# Altium PCB PCB1.PcbDoc
Units mm, origin at the board's own origin, x right, y up, seen from the top; angles counter-clockwise.
Board outline 100 x 68.1 mm, 2 copper layers (Top Layer, Bottom Layer), stack 1.571 mm thick; 56 components, 32 nets, 186 pads, 495 vias.
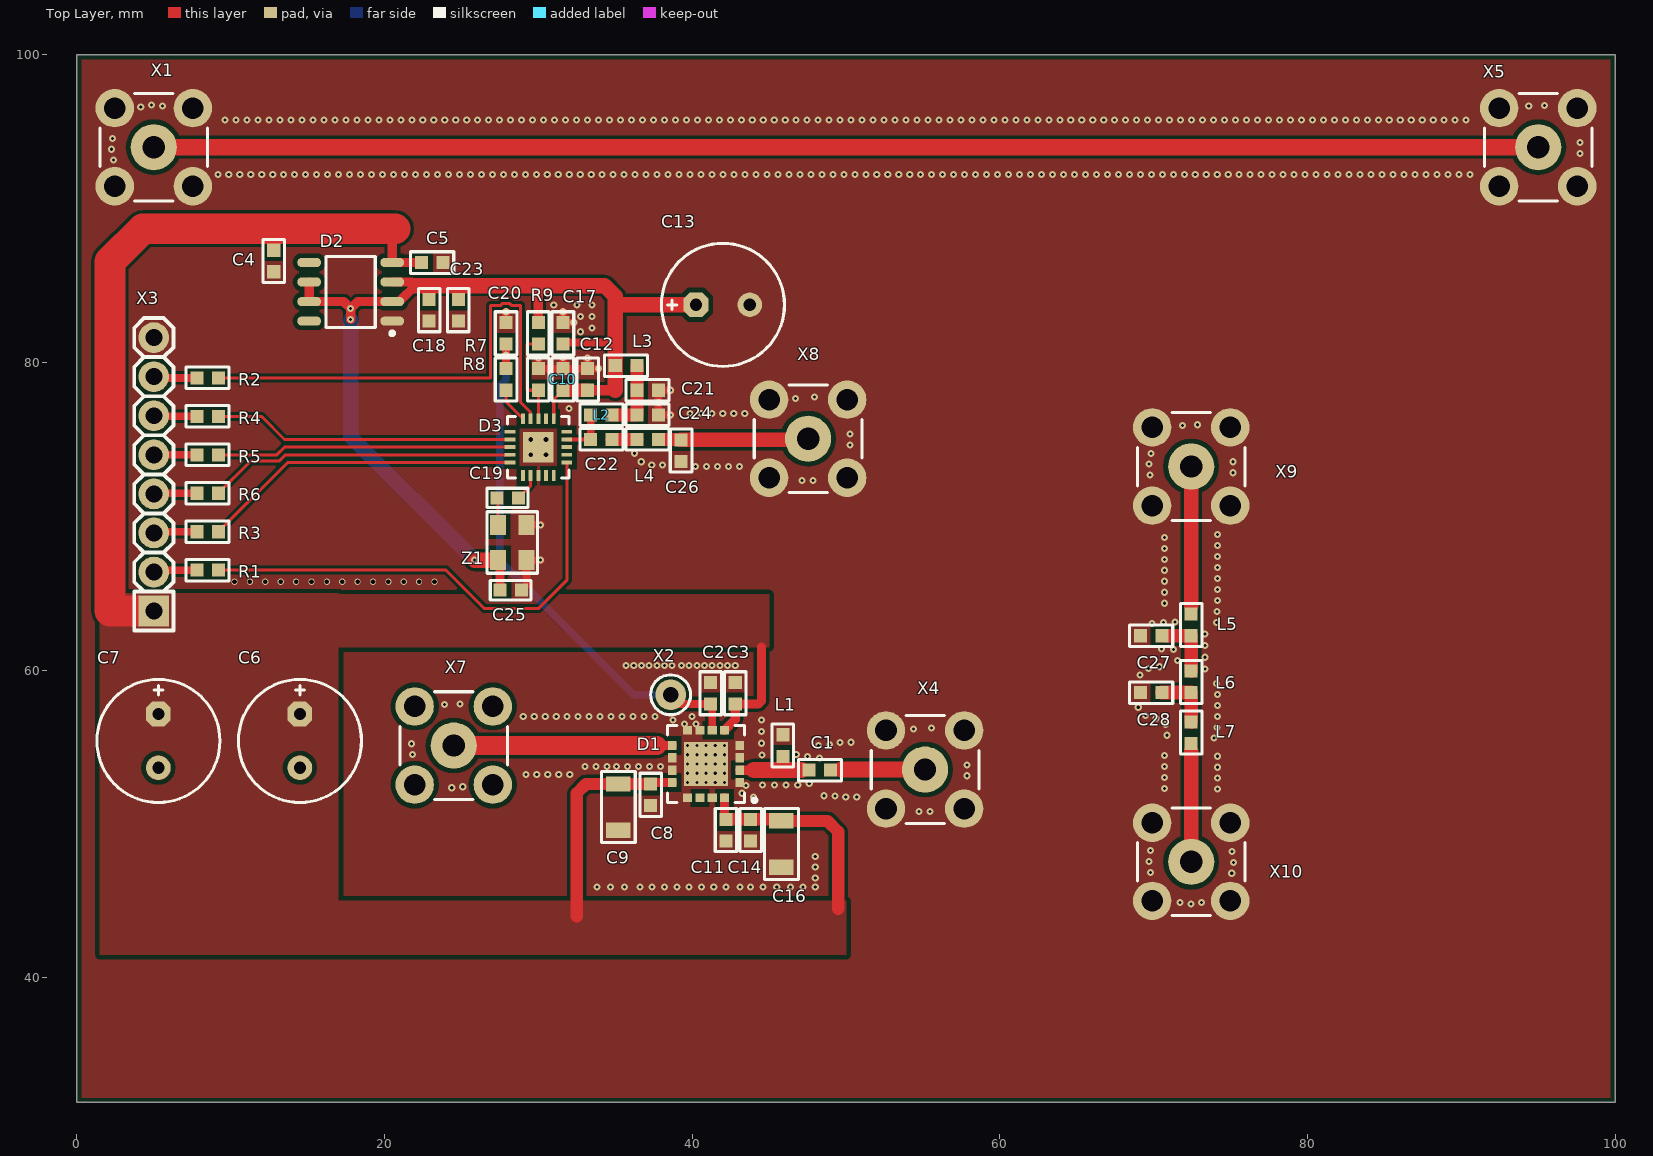
[diagram p0: Top Layer view]
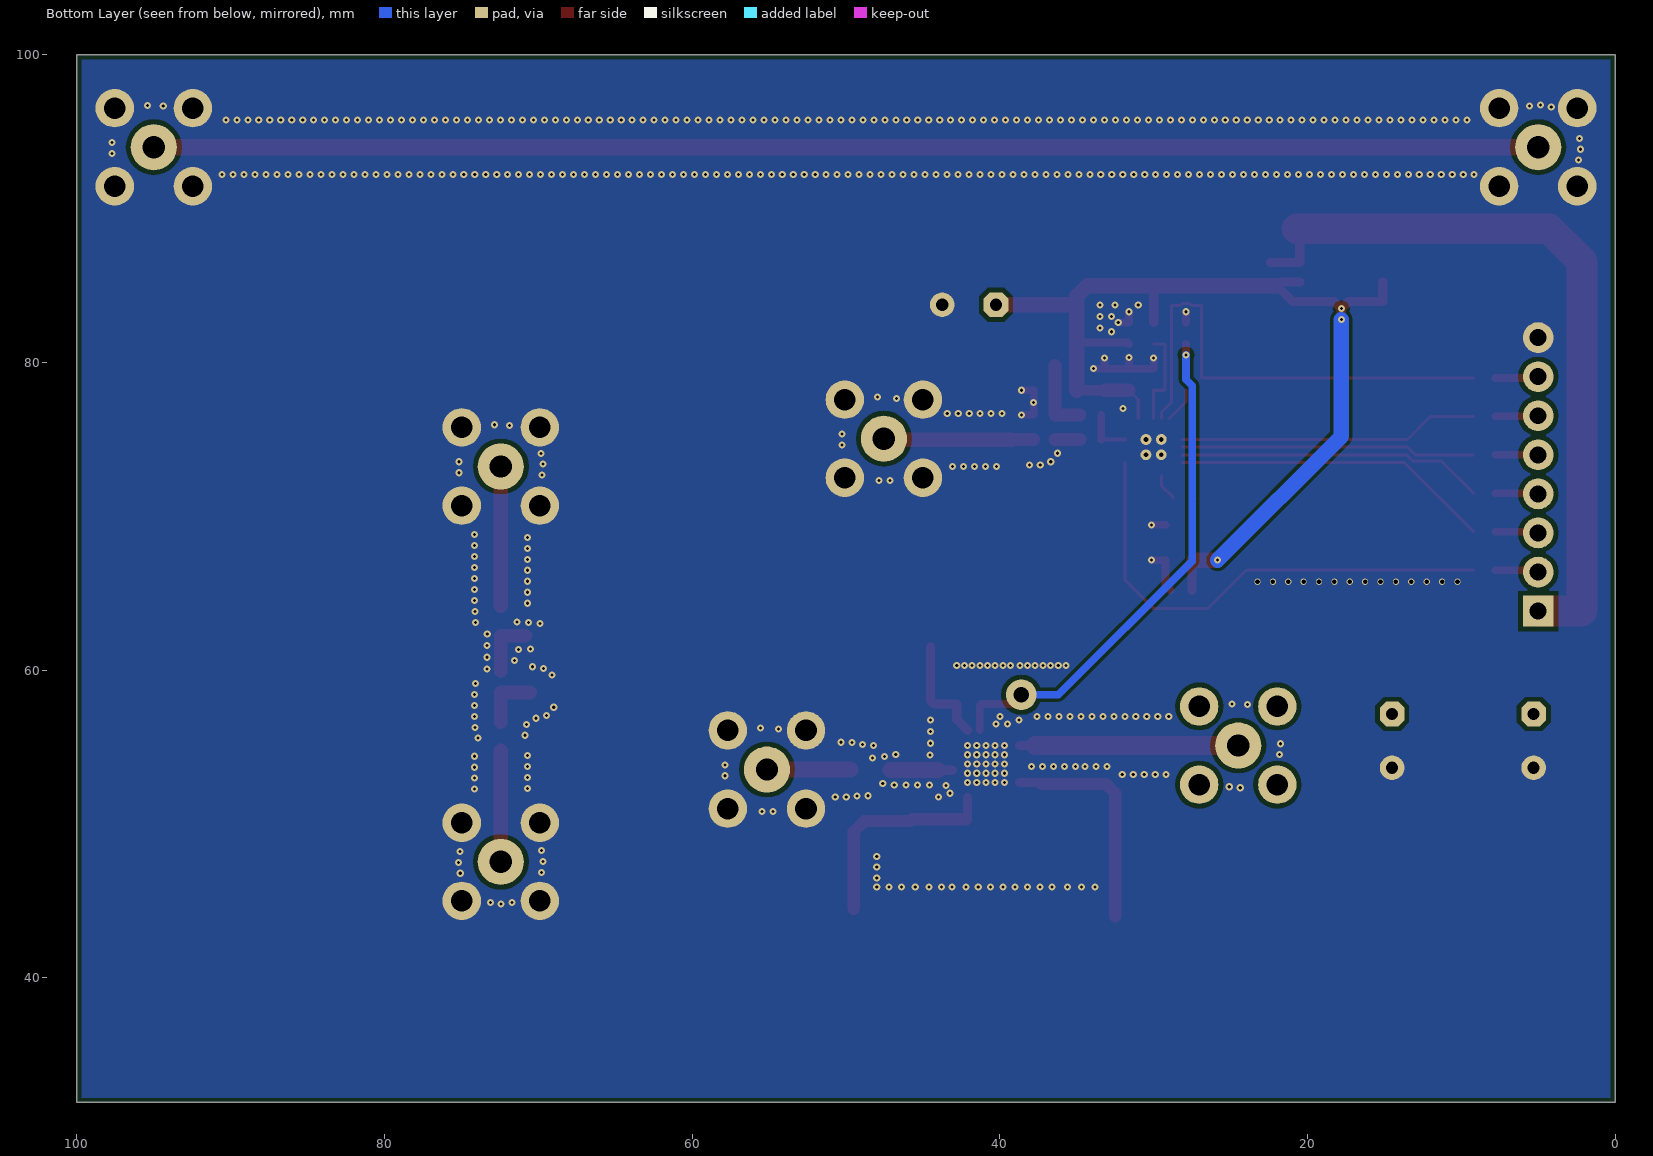
[diagram p1: Bottom Layer view, seen from below]
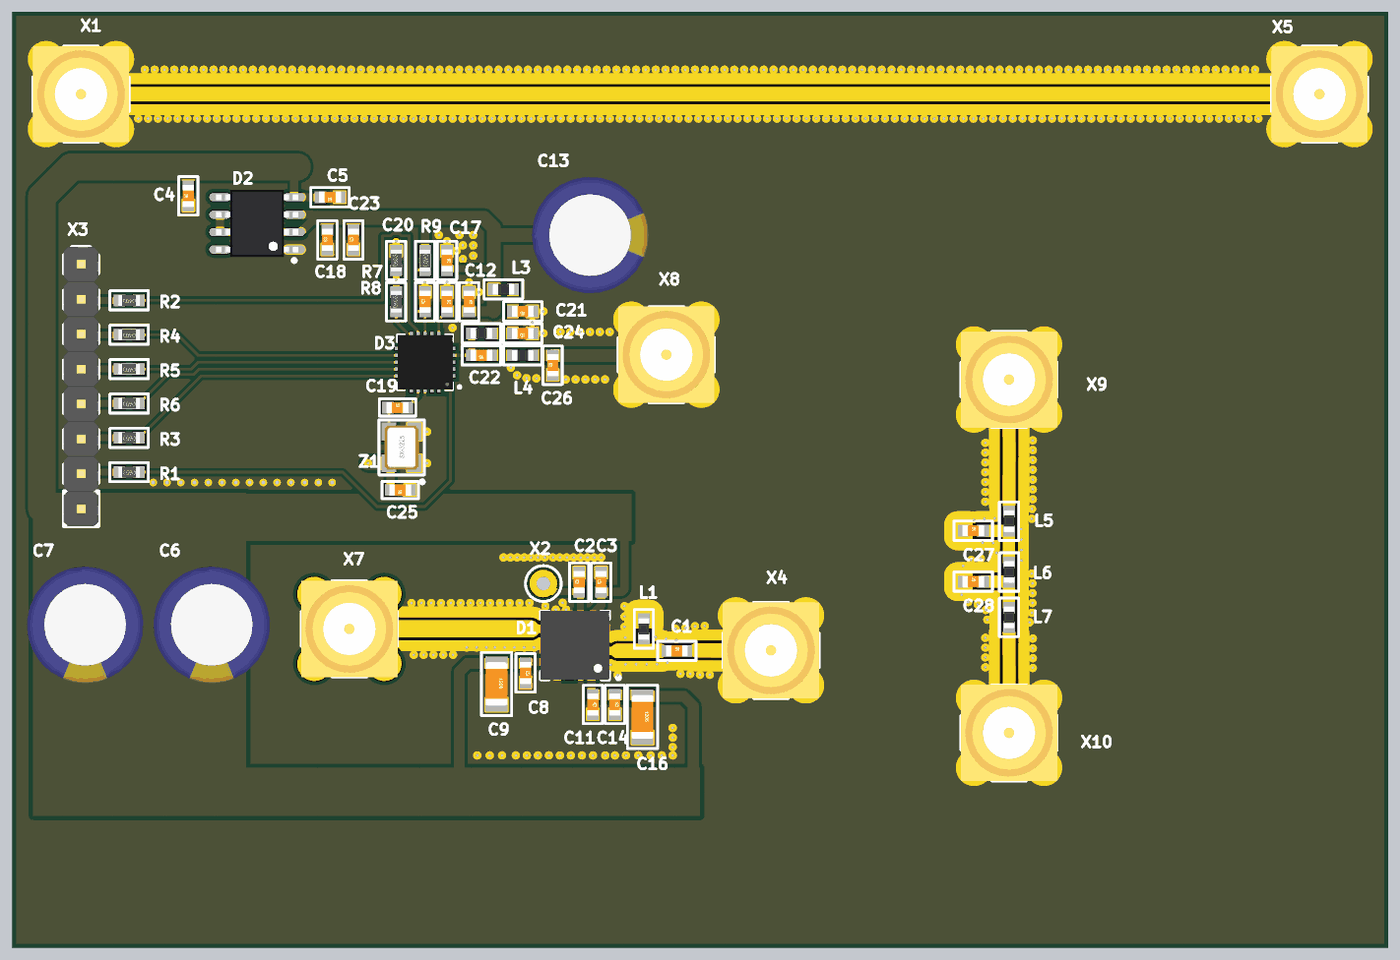
[diagram p2: 3D render of the assembled board from above, using the file's embedded part models]

## Layer stack, top to bottom
Top Solder: solder mask 0.013, Solder Resist, Dk 3.8
Top Layer: signal copper 0.0356
Dielectric 1: dielectric 1.5, FR-4, Dk 4.8
Bottom Layer: signal copper 0.0356
Bottom Solder: solder mask 0.013, Solder Resist, Dk 3.8

## Board outline
0,31.9 0,100 100,100 100,31.9

## Design rules (kind name [scope] priority, off if disabled: settings)
BoardOutlineClearance [All] p1: gap=0.3 ignorepadtopadclearanceinfootprint=FALSE
Clearance Clearance_MultiLayerPad [OnLayer('Multi-Layer') and IsPad] p1: gap=0.3 ignorepadtopadclearanceinfootprint=FALSE except(0: Arc-Hole Track-Hole SMDPad-Hole THPad-Hole Via-Hole Fill-Hole Poly-Hole Region-Hole Text-Hole)
Clearance Clearance_Polygon [InPolygon] p2: gap=0.2 ignorepadtopadclearanceinfootprint=FALSE except(0: Arc-Hole Track-Hole SMDPad-Hole THPad-Hole Via-Hole Fill-Hole Poly-Hole Region-Hole Text-Hole; 0.3: Arc-Poly Arc-Region Track-Region SMDPad-Poly SMDPad-Region THPad-Poly THPad-Region Via-Poly Via-Region Fill-Poly Fill-Region Poly-Poly Poly-Region Region-Region)
Clearance [All] p3: gap=0.2 ignorepadtopadclearanceinfootprint=FALSE except(0: Arc-Hole Track-Hole SMDPad-Hole THPad-Hole Via-Hole Fill-Hole Poly-Hole Region-Hole Text-Hole)
ComponentClearance [All] p1: gap=0.5 collisioncheckmode=3 verticalgap=0.5 showdistances=FALSE
DiffPairsRouting [All] p1: maxlimit=0.4 minlimit=0.2 mostfreqgap=0.2 toplayer_minwidth=0.2 toplayer_maxwidth=0.3 toplayer_prefwidth=0.2 bottomlayer_minwidth=0.2 bottomlayer_maxwidth=0.3 bottomlayer_prefwidth=0.2 maxuncoupledlength=12.7
Height [All] p1: minheight=0 maxheight=50 prefheight=12.7
HoleSize [All] p1: absolutevalues=TRUE maxlimit=6.3 minlimit=0.2 maxpercent=80.000 minpercent=20.000
HoleToHoleClearance [All] p1: gap=0.3 allowstackedmicrovias=TRUE
MinimumAnnularRing [All] p1: minimumring=0.13
MinimumSolderMaskSliver [All] p1: minsoldermaskwidth=0.2
PlaneClearance [All] p1: clearance=0.5
PlaneConnect [All] p1: planeconnectstyle=Relief reliefexpansion=0.5 reliefentries=4 reliefconductorwidth=0.5 reliefairgap=0.3
PolygonConnect PolygonConnect_1 [InNet('VCC')] p1: connectstyle=Relief reliefconductorwidth=0.254 reliefentries=4 polygonreliefangle="90 Angle" airgapwidth=0.254
PolygonConnect PolygonConnect_PadGND [InNet('GND') and IsPad] p2: connectstyle=Direct reliefconductorwidth=0.5 reliefentries=4 polygonreliefangle="90 Angle" airgapwidth=0.3
PolygonConnect PolygonConnect_Via [IsVia] p3: connectstyle=Direct reliefconductorwidth=0.254 reliefentries=4 polygonreliefangle="90 Angle" airgapwidth=0.254
PolygonConnect [All] p4: connectstyle=Direct reliefconductorwidth=0.5 reliefentries=4 polygonreliefangle="90 Angle" airgapwidth=0.3
RoutingTopology [All] p1: topology=Vertical
RoutingVias [All] p1: holewidth=0.2 width=0.4 viastyle="Through Hole" minholewidth=0.2 minwidth=0.4 maxholewidth=0.5 maxwidth=1.2
SilkToSolderMaskClearance [IsPad] p1: minsilkscreentomaskgap=0.2 clearancetoexposedcopper=TRUE
SolderMaskExpansion [All] p1: expansion=0.075
Width [All] p1: maxlimit=10 minlimit=0.2 preferedwidth=0.2
20 further rules are at their usual default settings.

## Components (designator, comment, footprint, x,y, rotation, side; value= is the part's Value field where it differs from the comment)
C1 "0 пФ" CH0603C#1 48.3,53.5 r0 top
C2 "3300 пФ" CH0603C#2 41.2,58.5 r90 top
C3 "3300 пФ" CH0603C#2 42.8,58.5 r90 top
C4 "0,1 мкФ" CH0603C#2 12.8,86.6 r90 top
C5 "0,1 мкФ" CH0603C#2 23.1,86.5 r180 top
C6 "820 мкФ" D8C3.5H12 14.5,55.4 r270 top
C7 "820 мкФ" D8C3.5H12 5.3,55.4 r270 top
C8 "3300 пФ" CH0603C#2 37.3,51.9 r270 top
C9 "10 мкФ" CH1206C 35.2,51.1 r270 top
C10 "3300 пФ" CH0603C#2 31.6,78.9 r270 top
C11 "100 пФ" CH0603C#2 42.2,49.6 r270 top
C12 "0,1 мкФ" CH0603C#2 33.2,78.9 r270 top
C13 "820 мкФ" D8C3.5H12 42,83.75 r0 top
C14 "3300 пФ" CH0603C#2 43.8,49.6 r270 top
C16 "10 мкФ" CH1206C 45.8,48.7 r270 top
C17 "0,1 мкФ" CH0603C#2 31.6,81.9 r270 top
C18 "0,1 мкФ" CH0603C#2 22.9,83.4 r90 top
C19 "Ceramic capacitor, 0.1 мкФ, X7R, ±10%, 16V, 0603, -55...+125°C" "CAP: 0603" 28,71.2 r0 top value="0.1 мкФ"
C20 "0,1 мкФ" CH0603C#2 30,78.9 r90 top
C21 "0,1 мкФ" CH0603C#2 37.1,78.2 r180 top
C22 "3,3 пФ" CH0603C#2 34.1,75 r180 top
C23 "0,1 мкФ" CH0603C#2 24.8,83.4 r90 top
C24 "3300 пФ" CH0603C#2 37.1,76.6 r180 top
C25 "Ceramic capacitor, 100 пФ, NP0, ±10%, 16V, 0603, -55...+125°C" "CAP: 0603" 28.2,65.2 r180 top value="100 пФ"
C26 "5,1 пФ" CH0603C#2 39.275,74.275 r90 top
C27 "3,3 пФ" CH0603C#1 69.84,62.24 r0 top
C28 "10 пФ" CH0603C#1 69.84,58.54 r0 top
D1 "SKY66295-11" "16-LGA (5x5)" 40.9,53.9 r180 top
D2 "LD1117D33" 8-SOIC 17.8,84.6 r180 top
D3 "SI4464-B1B-FM" "20-QFN (4x4)" 30,74.5 r180 top
L1 "DNI" CH0603L#1 45.9,55.1 r90 top
L2 "120 нГн" CH0603L#2 34.1,76.6 r180 top
L3 "120 нГн" CH0603L#2 35.7,79.8 r0 top
L4 "15 нГн" CH0603L#2 37.1,75 r180 top
L5 "12 нГн" CH0603L#1 72.44,62.94 r90 top
L6 "12 нГн" CH0603L#1 72.44,59.24 r90 top
L7 "0 нГн" CH0603L#1 72.44,55.94 r90 top
R1 "100 Ом" CH0603R 8.5,66.5 r180 top
R2 "100 Ом" CH0603R 8.5,79 r180 top
R3 "100 Ом" CH0603R 8.5,69 r180 top
R4 "100 Ом" CH0603R 8.5,76.5 r180 top
R5 "100 Ом" CH0603R 8.5,74 r180 top
R6 "100 Ом" CH0603R 8.5,71.5 r180 top
R7 "1 кОм" CH0603R 27.9,81.9 r90 top
R8 "1 кОм" CH0603R 27.9,78.9 r90 top
R9 "4,7 Ом" CH0603R 30,81.9 r270 top
X1 "Connector SMA, 50 Ohm, 3GHz" "CON: SMA" 5,94 r0 top
X2 "*" "CON: PADS 1x1mm" 38.6,58.4 r0 top
X3 "*" "CON: PLS-8" 5,72.73 r90 top
X4 "Connector SMA, 50 Ohm, 3GHz" "CON: SMA" 55.14,53.54 r270 top
X5 "Connector SMA, 50 Ohm, 3GHz" "CON: SMA" 95,94 r270 top
X7 "Connector SMA, 50 Ohm, 3GHz" "CON: SMA" 24.5,55.1 r180 top
X8 "Connector SMA, 50 Ohm, 3GHz" "CON: SMA" 47.536,75.049 r0 top
X9 "Connector SMA, 50 Ohm, 3GHz" "CON: SMA" 72.44,73.24 r270 top
X10 "Connector SMA, 50 Ohm, 3GHz" "CON: SMA" 72.44,47.54 r270 top
Z1 "JT33-B-K-3,3-LF-26,0MHz" "OSC: 3225" 28.3,68.3 r90 top

## Footprints (in the part's own frame and the unit in brackets; to place one, negate y for a bottom-side part, rotate by r counter-clockwise, add the part's x,y. Pads: shape width x height; smd on the part's side, far side on the other; paste and mask are expansions set on the pad)
8-SOIC [mm]
  rrect100% 1.55x0.6 smd: 1(-2.7,1.905) 2(-2.7,0.635) 3(-2.7,-0.635) 4(-2.7,-1.905) 5(2.7,-1.905) 6(2.7,-0.635) 7(2.7,0.635) 8(2.7,1.905)
  round 0.7 on Mech1: 28(-2.395,1.8)
  silkscreen extent -2.82,-2.3 1.61,2.82, body extent -3,-2.45 3,2.45, height 1.75
"16-LGA (5x5)" [mm] "PQFN, 16-Leads, Body 5,00x5,00mm, Pitch 0,80mm, Thermal Pad 2,88x2,88mm, IPC Medium Density"
  rect 2.88x2.88 smd: 0(0,0)
  rect 0.55x0.6 smd: 1(-2.2,1.2) 2(-2.2,0.4) 3(-2.2,-0.4) 4(-2.2,-1.2) 9(2.2,-1.2) 10(2.2,-0.4) 11(2.2,0.4) 12(2.2,1.2)
  rect 0.6x0.55 smd: 5(-1.2,-2.2) 6(-0.4,-2.2) 7(0.4,-2.2) 8(1.2,-2.2) 13(1.2,2.2) 14(0.4,2.2) 15(-0.4,2.2) 16(-1.2,2.2)
  silkscreen extent -3.28,-2.5 2.5,2.5, body extent -2.5,-2.5 2.5,2.5, height 1.4
"20-QFN (4x4)" [mm]
  round 0.4 on Top Overlay: 0(-2.5,1.8)
  rect 0.7x0.25 smd: 1(-1.85,1) 2(-1.85,0.5) 3(-1.85,0) 4(-1.85,-0.5) 5(-1.85,-1) 11(1.85,-1) 12(1.85,-0.5) 13(1.85,0) 14(1.85,0.5) 15(1.85,1)
  rect 0.25x0.7 smd: 6(-1,-1.85) 7(-0.5,-1.85) 8(0,-1.85) 9(0.5,-1.85) 10(1,-1.85) 16(1,1.85) 17(0.5,1.85) 18(0,1.85) 19(-0.5,1.85) 20(-1,1.85)
  round 0.7 hole 0.3: 21(-0.5,0.5) 21(0.5,-0.5)
  rect 2x2 smd: 21(0,0)
  round 0.5 on Mech1: 23(-1.5,1.5)
  silkscreen extent -2,-2 2,2, body extent -2.02,-2.01 2,2.01, height 0.78
"CAP: 0603" [mm]
  rect 0.85x0.85 smd: 1(-0.7,0) 2(0.7,0)
  silkscreen extent -1.33,-0.63 1.33,0.63, body extent -0.8,-0.4 0.8,0.4, height 0.3
CH0603C#1 [mm] "Chip Capacitor, 2-Leads, Body 1,53x0,85mm, IPC Medium Density"
  rect 0.85x0.85 smd mask+1: 1(-0.7,0) 2(0.7,0)
  silkscreen extent -1.4,-0.7 1.4,0.7, body extent -0.8,-0.4 0.8,0.4, height 0.3
CH0603C#2 [mm] "Chip Capacitor, 2-Leads, Body 1,53x0,85mm, IPC Medium Density"
  rect 0.85x0.85 smd: 1(-0.7,0) 2(0.7,0)
  silkscreen extent -1.4,-0.7 1.4,0.7, body extent -0.8,-0.4 0.8,0.4, height 0.3
CH0603L#1 [mm]
  rect 0.85x0.85 smd mask+1: 1(-0.7,0) 2(0.7,0)
  silkscreen extent -1.4,-0.7 1.4,0.7, body extent -0.8,-0.4 0.8,0.4, height 0.8
CH0603L#2 [mm]
  rect 0.85x0.85 smd: 1(-0.7,0) 2(0.7,0)
  silkscreen extent -1.4,-0.7 1.4,0.7, body extent -0.8,-0.4 0.8,0.4, height 0.8
CH0603R [mm]
  rect 0.85x0.85 smd: 1(-0.7,0) 2(0.7,0)
  silkscreen extent -1.4,-0.7 1.4,0.7, body extent -0.8,-0.4 0.8,0.4, height 0.44
CH1206C [mm] "Non polar chip capacitor, size 1206"
  rect 1x1.6 smd: 1(-1.5,0) 2(1.5,0)
  silkscreen extent -2.3,-1.1 2.3,1.1, body extent -1.6,-0.8 1.6,0.8, height 1
"CON: PADS 1x1mm" [mm]
  round 2 hole 1: 1(0,0)
  silkscreen extent -1.3,-1.3 1.3,1.3
"CON: PLS-8" [mm] "PLS-40 8 pin header"
  rect 2x2 hole 1.1: 1(-8.89,0)
  round 2 hole 1.1: 2(-6.35,0) 3(-3.81,0) 4(-1.27,0) 5(1.27,0) 6(3.81,0) 7(6.35,0) 8(8.89,0)
  silkscreen extent -10.16,-1.27 10.16,1.27, body extent -10.16,-1.27 10.16,1.27, height 8.54
"CON: SMA" [mm]
  round 3 hole 1.45: 1(0,0)
  round 2.5 hole 1.4: 2(-2.54,-2.54) 2(-2.54,2.54) 2(2.54,-2.54) 2(2.54,2.54)
  silkscreen extent -3.5,-3.5 3.5,3.5, body extent -3.5,-3.5 3.5,3.5, height 9.53
D8C3.5H12 [mm] "Polar capacitor, diameter 8 mm, leads clearance 3.5 mm, height 12 mm"
  oct 1.6x1.6 hole 0.8: 1(-1.75,0)
  round 1.6 hole 0.8: 2(1.75,0)
  silkscreen extent -4,-4 4,4, body extent -4.25,-4.25 4.25,4.25, height 13
"OSC: 3225" [mm]
  rect 1.3x1.05 smd: 1(-1.15,-0.925) 2(1.15,-0.925) 3(1.15,0.925) 4(-1.15,0.925)
  round 0.5 on Top Overlay: ""(-2.5,-1.5)
  silkscreen extent -2,-1.65 2,1.65, body extent -1.6,-1.25 1.6,1.25, height 0.81

## Part data
C1: library part Capacitor, Manufacturer=MURATA, Package=0603, Tolerance=±5%, TypeDielectric=NP0, ValueManufacturerPartNumber="0603-NP0-50В-0 пФ±5% MURATA", Voltage=50В
C2 C3 C8 C10 C14 C24: library part Capacitor, Manufacturer=MURATA, Package=0603, Tolerance=±5%, TypeDielectric=NP0, ValueManufacturerPartNumber="0603-NP0-50В-3300 пФ±5% MURATA", Voltage=50В
C4 C5 C12 C17 C18 C20 C21 C23: library part Capacitor, Manufacturer=MURATA, Package=0603, Tolerance=±5%, TypeDielectric=X7R, ValueManufacturerPartNumber="0603-X7R-50В-0,1 мкФ±5% MURATA", Voltage=50В
C6 C7 C13: library part AlumCap, Manufacturer=KEMET, Model=A755KS827M1AAAE014
C9 C16: library part Capacitor, Manufacturer=MURATA, Package=1206, Tolerance=±5%, TypeDielectric=X7R, ValueManufacturerPartNumber="1206-X7R-50В-10 мкФ±5% MURATA", Voltage=50В
C11: library part Capacitor, Manufacturer=MURATA, Package=0603, Tolerance=±5%, TypeDielectric=NP0, ValueManufacturerPartNumber="0603-NP0-50В-100 пФ±5% MURATA", Voltage=50В
C19: library part Ceramic_0603, Manufacturer=Yageo, Package=0603, PartNumber=CC0603KRX7R7BB104, Temperature=-55...+125°C, Tolerance=±10%, TypeCapacitor="Ceramic capacitor", TypeDielectric=X7R, Voltage=16V, HelpURL=https://www.digikey.com/product-detail/en/yageo/CC0603KRX7R7BB104/311-1088-1-ND/302998, ValueManufacturerPartNumber="Ceramic capacitor, 0.1 мкФ, X7R, ±10%, 16V, 0603, -55...+125°C"
C22 C27: library part Capacitor, Manufacturer=MURATA, Package=0603, Tolerance=±5%, TypeDielectric=NP0, ValueManufacturerPartNumber="0603-NP0-50В-3,3 пФ±5% MURATA", Voltage=50В
C25: library part Ceramic_0603, Manufacturer=Yageo, Package=0603, PartNumber=CC0603KRX7R7BB104, Temperature=-55...+125°C, Tolerance=±10%, TypeCapacitor="Ceramic capacitor", TypeDielectric=NP0, Voltage=16V, HelpURL=https://www.digikey.com/product-detail/en/yageo/CC0603KRX7R7BB104/311-1088-1-ND/302998, ValueManufacturerPartNumber="Ceramic capacitor, 100 пФ, NP0, ±10%, 16V, 0603, -55...+125°C"
C26: library part Capacitor, Manufacturer=MURATA, Package=0603, Tolerance=±5%, TypeDielectric=NP0, ValueManufacturerPartNumber="0603-NP0-50В-5,1 пФ±5% MURATA", Voltage=50В
C28: library part Capacitor, Manufacturer=MURATA, Package=0603, Tolerance=±5%, TypeDielectric=NP0, ValueManufacturerPartNumber="0603-NP0-50В-10 пФ±5% MURATA", Voltage=50В
D1: "800 to 900 MHz High-Efficiency 4 W Power Amplifier", ValueManufacturerPartNumber="SKY66295-11 *", Model=SKY66295-11
D2: Manufacturer="ST MICROELECTRONICS", Package=SOIC-8, HelpURL=https://www.digikey.com/en/products/detail/stmicroelectronics/LD1117D33TR/1165909, Model=LD1117D33
D3: library part SI4464, "RF Transceiver FSK/GFSK/GMSK/MSK/OOK 3.3V 20-Pin QFN", Manufacturer="SILICON LABS", Package=QFN-20, ValueManufacturerPartNumber="SI4464-B1B-FM SILICON LABS", Model=SI4464-B1B-FM, URL=https://www.silabs.com/wireless/proprietary/ezradiopro-sub-ghz-ics/device.si4464
L1: library part Inductor, Tolerance=±5%, ValueManufacturerPartNumber="* DNI ±5% *"
L2 L3: library part Inductor, Tolerance=±5%, ValueManufacturerPartNumber="* 120 нГн ±5% *"
L4: library part Inductor, Tolerance=±5%, ValueManufacturerPartNumber="* 15 нГн ±5% *"
L5 L6: library part Inductor, Tolerance=±5%, ValueManufacturerPartNumber="* 12 нГн ±5% *"
L7: library part Inductor, Tolerance=±5%, ValueManufacturerPartNumber="* 0 нГн ±5% *"
R1 R2 R3 R4 R5 R6: library part Resistor, Manufacturer=YAGEO, Package=0603, Power=0,1, Tolerance="± 5%", ValueManufacturerPartNumber="RC0603-0,1-100 Ом ± 5% YAGEO", ComponentKind=Резистор, Prefix=RC
R7 R8: library part Resistor, Manufacturer=YAGEO, Package=0603, Power=0,1, Tolerance="± 5%", ValueManufacturerPartNumber="RC0603-0,1-1 кОм ± 5% YAGEO", ComponentKind=Резистор, Prefix=RC
R9: library part Resistor, Manufacturer=YAGEO, Package=0603, Power=0,1, Tolerance="± 5%", ValueManufacturerPartNumber="RC0603-0,1-4,7 Ом ± 5% YAGEO", ComponentKind=Резистор, Prefix=RC
X1 X4 X5 X7 X8 X9 X10: library part Connector_SMA, Frequency=3GHz, Manufacturer="TE Connectivity", PartNumber=5-1814832-1, CommentText="\"Разъем\"", HelpURL=https://www.digikey.com/product-detail/en/te-connectivity-amp-connectors/5-1814832-1/A97594-ND/1755982, Impedance="50 Ohm", TypeConnector="Connector SMA", ValueManufacturerPartNumber="Connector SMA, 50 Ohm, 3GHz"
X2: library part 1-Connector
X3: library part 8-Connector
Z1: library part Oscilator_3225, Manufacturer=JAUCH, Package="3.2mm x 2.5mm", HelpURL=https://www.jauch.com/downloadfile/57ff72b1b7707_2612e42791cc621776f7/jt33_190222_online.pdf, Model=JT33-B-K-3,3-LF-26,0MHz

## Via types
v1: diameter 0.46, hole 0.2, Top Layer to Bottom Layer, 479 vias
v2: diameter 0.4, hole 0.3, Top Layer to Bottom Layer, 14 vias
v3: diameter 0.7, hole 0.3, Top Layer to Bottom Layer, 2 vias

## Nets (pads, with @x,y where several pads share a name; then routed paths per layer and width w, separated by ;. In a path a pad name is that pad's centre, name@x,y a point inside that pad or via, vN(x,y) a via of type N, cw(c..) or ccw(c..) an arc to the next point about the centre after c; other vN are vias at no path point)
5V: C3.1 C4.2 C5.2 C6.1 C7.1 C8.1 C9.1 C11.1 C14.1 C16.1 D1.5 D1.12 D1.16 D2.4 X3.1 | length 85
  Top Layer w0.6: 20.7,88.7 20.5,88.5 D2.4 20.505,86.5 C5.2 ; C8.1 37.4,52.7 D1.12 ; D1.16 42.1,50.4 C11.1 ; D1.5 42.8,56.8 C3.1 44.3,57.8 44.5,58 44.5,61.5
  Top Layer w0.8: 32.5,44 32.5,52 33.1,52.6 C9.1 C8.1 ; C11.1 C14.1 45.7,50.3 C16.1 48.8,50.2 49.5,49.5 49.5,44.5
  Top Layer w2: X3.1 2.16,63.84 2.16,86.56 4.3,88.7 20.7,88.7
EN: C2.1 D1.6 R7.1 R8.2 X2.1 | length 34.5
  Top Layer w0.5: R8.2 R7.1 ; X2.1 39.2,57.8 C2.1 41.3,57.7 D1.6
  Bottom Layer w0.5: v1(27.9,80.5) 27.9,78.9 27.5,78.5 27.5,67.1 36.2,58.4 X2.1
GND: C2.2 C3.2 C4.1 C5.1 C6.2 C7.2 C8.2 C9.2 C10.1 C11.2 C12.1 C13.2 C14.2 C16.2 C17.1 C18.1 C20.2 C21.1 C23.1 C24.1 C25.1 C26.1 C27.1 C28.1 D1.0 D1.1 D1.3 D1.4 D1.7 D1.8 D1.10 D1.11 D1.13 D1.15 D2.1 D3.18 D3.21 L1.2 R7.2 X1.2 X3.8 X4.2 X5.2 X8.2 X9.2 X10.2 Z1.1 Z1.2 | length 15.3
  Top Layer w0.5: R7.2 v1(27.9,83.3) ; C25.1 29.225,65.525 Z1.1 v1(30.15,67.15) ; Z1.2 v1(30.15,69.45) ; v1(30,80.3) C20.2 C10.1 ; v1(31.6,80.325) C10.1 ; v1(31.6,83.3) C17.1 v1(32.3,82.6) ; v1(33.2,80.3) C12.1 ; v1(33.9,79.6) C12.1 ; v1(38.6,76.6) C24.1 v1(37.8,77.4) C21.1 v1(38.6,78.2) ; C10.1 C12.1
  other v1: 72.415,44.801 71.707,44.898 73.124,44.884 33.8,45.9 34.7,45.9 35.6,45.9 36.6,45.9 37.4,45.9 38.2,45.9 39,45.9 39.8,45.9 40.6,45.9 41.4,45.9 42.2,45.9 43.1,45.9 43.8,45.9 44.6,45.9 45.5,45.9 46.4,45.9 47.2,45.9 48,45.9 48,46.5 75.079,46.798 69.786,46.847 48,47.2 75.179,47.505 69.702,47.556 48,47.9 75.099,48.215 69.796,48.264 55.459,50.818 54.745,50.825 44,51.75 49.983,51.764 50.697,51.764 49.271,51.825 48.557,51.837 43.25,52 74.165,52.263 70.715,52.311 24.371,52.359 25.083,52.423 43.5,52.5 44.581,52.526 45.341,52.526 46.101,52.526 46.861,52.526 47.613,52.637 39.7,52.7 40.3,52.7 40.3,52.7 40.9,52.7 41.5,52.7 42.1,52.7 74.165,52.977 70.715,53.025 57.854,53.135 29.184,53.217 29.898,53.217 30.612,53.217 31.326,53.217 32.04,53.217 39.7,53.3 40.3,53.3 40.3,53.3 40.9,53.3 41.5,53.3 42.1,53.3 74.165,53.691 70.715,53.739 33.036,53.75 33.75,53.75 34.464,53.75 35.072,53.75 35.786,53.75 36.5,53.75 37.214,53.75 37.928,53.75 57.863,53.849 39.7,53.9 40.3,53.9 40.3,53.9 40.9,53.9 41.5,53.9 42.1,53.9 48.264,54.282 47.51,54.375 74.165,54.405 44.544,54.474 70.715,54.453 39.7,54.5 40.3,54.5 40.3,54.5 40.9,54.5 41.5,54.5 42.1,54.5 21.824,54.507 46.764,54.52 39.7,55.1 40.3,55.1 40.3,55.1 40.9,55.1 41.5,55.1 42.1,55.1 48.207,55.104 48.918,55.166 21.758,55.218 44.5,55.25 49.618,55.305 50.332,55.316 73.929,55.581 70.867,55.771 44.5,56 54.39,56.176 55.556,56.253 74.106,56.272 70.759,56.477 39.5,56.5 40.25,56.5 38.75,56.75 44.5,56.75 70.166,56.874 29.019,56.983 29.733,56.983 30.447,56.983 31.161,56.983 31.875,56.983 32.589,56.983 33.303,56.983 34.017,56.983 34.731,56.983 35.445,56.983 36.159,56.983 36.873,56.983 37.587,56.983 74.14,56.986 40,57 69.475,57.055 69.001,57.589 74.14,57.7 23.896,57.774 24.916,57.813 74.14,58.414 74.085,59.125 69.113,59.679 73.337,60.08 69.678,60.115 70.384,60.221 35.7,60.3 36.2,60.3 36.7,60.3 37.2,60.3 37.7,60.3 38.2,60.3 38.7,60.3 39.3,60.3 39.8,60.3 40.3,60.3 40.8,60.3 41.3,60.3 41.8,60.3 42.3,60.3 42.8,60.3 71.543,60.629 73.337,60.84 71.281,61.343 70.521,61.377 73.337,61.6 73.322,62.36 69.883,63.027 70.639,63.106 74.092,63.109 71.398,63.137 74.114,63.823 70.715,64.352 74.165,64.535 70.715,65.066 74.165,65.249 70.715,65.78 74.165,65.963 70.715,66.494 74.165,66.677 70.715,67.208 74.165,67.391 70.715,67.922 74.165,68.105 70.715,68.636 74.165,68.819 47.855,72.326 47.141,72.334 69.759,72.681 75.154,72.835 40.223,73.25 40.937,73.25 41.651,73.25 42.365,73.25 43.079,73.25 37.37,73.335 38.084,73.326 69.701,73.393 36.69,73.551 75.163,73.549 36.239,74.104 69.835,74.094 50.25,74.644 50.26,75.358 71.872,75.92 72.856,75.953 39.847,76.7 40.561,76.7 41.275,76.7 41.989,76.7 42.703,76.7 43.417,76.7 32,77 46.726,77.667 47.952,77.762 32.75,82 33.5,82.25 32.75,83 33.5,83 31,83.75 32.5,83.75 33.5,83.75 9.161,92.224 9.875,92.224 10.589,92.224 11.303,92.224 12.017,92.224 12.731,92.224 13.445,92.224 14.159,92.224 14.873,92.224 15.587,92.224 16.301,92.224 17.015,92.224 17.729,92.224 18.443,92.224 19.157,92.224 19.871,92.224 20.585,92.224 21.299,92.224 22.013,92.224 22.727,92.224 23.441,92.224 24.155,92.224 24.869,92.224 25.583,92.224 26.297,92.224 27.011,92.224 27.725,92.224 28.439,92.224 29.153,92.224 29.867,92.224 30.581,92.224 31.295,92.224 32.009,92.224 32.723,92.224 33.437,92.224 34.151,92.224 34.865,92.224 35.579,92.224 36.293,92.224 37.007,92.224 37.721,92.224 38.435,92.224 39.149,92.224 39.863,92.224 40.577,92.224 41.291,92.224 42.005,92.224 42.719,92.224 43.433,92.224 44.147,92.224 44.861,92.224 45.575,92.224 46.289,92.224 47.003,92.224 47.717,92.224 48.431,92.224 49.145,92.224 49.859,92.224 50.573,92.224 51.287,92.224 52.001,92.224 52.715,92.224 53.429,92.224 54.143,92.224 54.857,92.224 55.571,92.224 56.285,92.224 56.999,92.224 57.713,92.224 58.427,92.224 59.141,92.224 59.855,92.224 60.569,92.224 61.283,92.224 61.997,92.224 62.711,92.224 63.425,92.224 64.139,92.224 64.853,92.224 65.567,92.224 66.281,92.224 66.995,92.224 67.709,92.224 68.423,92.224 69.137,92.224 69.851,92.224 70.565,92.224 71.279,92.224 71.993,92.224 72.707,92.224 73.421,92.224 74.135,92.224 74.849,92.224 75.563,92.224 76.277,92.224 76.991,92.224 77.705,92.224 78.419,92.224 79.133,92.224 79.847,92.224 80.561,92.224 81.275,92.224 81.989,92.224 82.703,92.224 83.417,92.224 84.131,92.224 84.845,92.224 85.559,92.224 86.273,92.224 86.987,92.224 87.701,92.224 88.415,92.224 89.129,92.224 89.843,92.224 90.557,92.224 2.39,93.163 97.714,93.595 2.259,93.865 97.723,94.309 2.322,94.576 9.635,95.776 10.349,95.776 11.063,95.776 11.777,95.776 12.491,95.776 13.205,95.776 13.919,95.776 14.633,95.776 15.347,95.776 16.061,95.776 16.775,95.776 17.489,95.776 18.203,95.776 18.917,95.776 19.631,95.776 20.345,95.776 21.059,95.776 21.773,95.776 22.487,95.776 23.201,95.776 23.915,95.776 24.629,95.776 25.343,95.776 26.057,95.776 26.771,95.776 27.485,95.776 28.199,95.776 28.913,95.776 29.627,95.776 30.341,95.776 31.055,95.776 31.769,95.776 32.483,95.776 33.197,95.776 33.911,95.776 34.625,95.776 35.339,95.776 36.053,95.776 36.767,95.776 37.481,95.776 38.195,95.776 38.909,95.776 39.623,95.776 40.337,95.776 41.051,95.776 41.765,95.776 42.479,95.776 43.193,95.776 43.907,95.776 44.621,95.776 45.335,95.776 46.049,95.776 46.763,95.776 47.477,95.776 48.191,95.776 48.905,95.776 49.619,95.776 50.333,95.776 51.047,95.776 51.761,95.776 52.475,95.776 53.189,95.776 53.903,95.776 54.617,95.776 55.331,95.776 56.045,95.776 56.759,95.776 57.473,95.776 58.187,95.776 58.901,95.776 59.615,95.776 60.329,95.776 61.043,95.776 61.757,95.776 62.471,95.776 63.185,95.776 63.899,95.776 64.613,95.776 65.327,95.776 66.041,95.776 66.755,95.776 67.469,95.776 68.183,95.776 68.897,95.776 69.611,95.776 70.325,95.776 71.039,95.776 71.753,95.776 72.467,95.776 73.181,95.776 73.895,95.776 74.609,95.776 75.323,95.776 76.037,95.776 76.751,95.776 77.465,95.776 78.179,95.776 78.893,95.776 79.607,95.776 80.321,95.776 81.035,95.776 81.749,95.776 82.463,95.776 83.177,95.776 83.891,95.776 84.605,95.776 85.319,95.776 86.033,95.776 86.747,95.776 87.461,95.776 88.175,95.776 88.889,95.776 89.603,95.776 90.317,95.776 4.153,96.607 5.566,96.68 94.385,96.672 95.416,96.713 4.855,96.74
  other v2: 10.25,65.75 11.25,65.75 12.25,65.75 13.25,65.75 14.25,65.75 15.25,65.75 16.25,65.75 17.25,65.75 18.25,65.75 19.25,65.75 20.25,65.75 21.25,65.75 22.25,65.75 23.25,65.75
  other v3: 29.5,74 30.5,75
NetC1_1: C1.1 D1.2 L1.1 | length 4
  Top Layer w0.6: D1.2 44,53.5
  Top Layer w1.05: 44,53.5 47.1,53.5
NetC1_2: C1.2 X4.1 | length 5.4
  Top Layer w1.05: 49.7,53.54 X4.1
NetC19_1: C19.1 Z1.3 | length 1.9
  Top Layer w0.2: Z1.3 27.375,71.125 C19.1 C19.1@27.375,71.2
NetC19_2: C19.2 D3.17 | length 1.8
  Top Layer w0.2: C19.2 29.5,72 D3.17
NetC20_1: C20.1 D3.8 R9.2 | length 6.3
  Top Layer w0.2: D3.8 C20.1 29.3,78.2 29.25,78.25 29.25,81.2 R9.2
NetC21_2: C21.2 C24.2 L2.1 L3.2 | length 4.8
  Top Layer w0.85: L2.1 C24.2 C21.2 L3.2
NetC22_1: C22.1 L4.2 | length 1.6
  Top Layer w0.85: C22.1 L4.2
NetC22_2: C22.2 D3.4 L2.2 | length 3.2
  Top Layer w0.25: D3.4 C22.2
  Top Layer w0.5: C22.2 L2.2
NetC26_2: C26.2 L4.1 X8.1 | length 9.8
  Top Layer w0.85: L4.1 39.25,75 C26.2
  Top Layer w0.95: C26.2 X8.1@47.462,74.975
  Top Layer w1.05: X8.1@47.462,74.975 X8.1
NetC27_2: C27.2 L5.1 L6.2 | length 3.9
  Top Layer w0.5: L5.1@72.24,62.24 L5.1
  Top Layer w0.9: C27.2@70.84,62.24 L5.1@72.24,62.24 ; L6.2 L5.1
NetC28_2: C28.2 L6.1 L7.2 | length 3.8
  Top Layer w0.9: C28.2 L6.1 ; L7.2 L6.1
NetD1_9: D1.9 X7.1 | length 14.2
  Top Layer w0.6: 37.7,55.1 D1.9
  Top Layer w1.26: X7.1 37.7,55.1
NetD3_1: D3.1 R1.1 | length 32.1
  Top Layer w0.2: R1.1 24,66.5 26.5,64 30,64 31.85,65.85 D3.1
NetD3_9: D3.9 R2.1 | length 32.1
  Top Layer w0.2: R2.1 26.9,79 26.9,83.7 27.522,83.7 27.672,83.85 28.128,83.85 28.278,83.7 28.85,83.7 28.85,77.399 29.5,76.749 D3.9
NetD3_10: D3.10 R8.1 | length 2.3
  Top Layer w0.2: R8.1 27.9,77.45 D3.10
NetD3_12: D3.12 R4.1 | length 19.6
  Top Layer w0.2: R4.1 12,76.5 13.5,75 D3.12
NetD3_13: D3.13 R5.1 | length 19.2
  Top Layer w0.2: R5.1 13,74 13.5,74.5 D3.13
NetD3_14: D3.14 R6.1 | length 20
  Top Layer w0.2: R6.1 11.3,73.6 13.166,73.6 13.566,74 D3.14
NetD3_15: D3.15 R3.1 | length 20.8
  Top Layer w0.2: R3.1 13.7,73.5 D3.15
NetL5_2: L5.2 X9.1 | length 9
  Top Layer w0.95: 72.44,64.2 X9.1
NetL7_1: L7.1 X10.1 | length 7.2
  Top Layer w0.95: X10.1 72.44,54.75
NetR1_2: R1.2 X3.2 | length 2.8
  Top Layer w0.5: X3.2 5.12,66.5 R1.2
NetR2_2: R2.2 X3.7 | length 2.8
  Top Layer w0.5: X3.7 5.08,79 R2.2
NetR3_2: R3.2 X3.3 | length 2.8
  Top Layer w0.5: X3.3 5.08,69 R3.2
NetR4_2: R4.2 X3.6 | length 2.8
  Top Layer w0.2: X3.6 X3.6@5.04,76.5
  Top Layer w0.5: X3.6@5.04,76.5 R4.2
NetR5_2: R5.2 X3.5 | length 2.8
  Top Layer w0.5: X3.5 R5.2
NetR6_2: R6.2 X3.4 | length 2.8
  Top Layer w0.5: X3.4 5.04,71.5 R6.2
NetX1_1: X1.1 X5.1 | length 90
  Top Layer w1.05: X1.1 X5.1
VCC: C10.2 C12.2 C13.1 C17.2 C18.2 C23.2 C25.2 D2.2 D2.3 D2.6 D2.7 D3.6 L3.1 R9.1 Z1.4 | length 69.8
  Top Layer w0.2: D3.6 31,77.6 C10.2
  Top Layer w0.5: C17.2 31.7,81.3 35,81.3
  Top Layer w0.6: D2.6 D2.7 17.335,83.965 v1(17.8,83.5) ; v1(17.8,82.8) v1(17.8,83.5) ; D2.3 21.765,85.235 22,85 20.965,83.965 D2.2 18.265,83.965 v1(17.8,83.5) ; Z1.4 27.5,67.025 C25.2 ; R9.1 30,85
  Top Layer w0.7: C12.2 35,78.2
  Top Layer w0.85: C10.2 C12.2
  Top Layer w1: 22,85 30,85 34.3,85 35,84.3 35,83.75 ; v1(25.85,67.15) Z1.4 ; 35,78.2 35,81.3 35,83.75 ; C13.1 35,83.75
  Bottom Layer w1: v1(17.8,82.8) 17.8,75.2 v1(25.85,67.15)
pads on no net: D1.14 D2.5 D2.8 D2.28 D3.0 D3.2 D3.3 D3.5 D3.7 D3.11 D3.16 D3.19 D3.20 D3.23 X7.2 Z1.

## Polygon pours and split planes (outlines as drawn)
GND on Top Layer "Top Layer-No Net" (solid, pour order 28): 0,100 0,31.9 100,31.9 100,100
5V on Top Layer "Top Layer-No Net" (solid, pour order 22): 17,64.925 45,64.925 45,61.5 17,61.5
5V on Top Layer "Top Layer-No Net" (solid, pour order 18): 17,45 50,45 50,42.5 50,41.5 17,41.5
5V on Top Layer "Top Layer-No Net" (solid, pour order 16): 1.5,65 1.5,41.5 17,41.5 17,65
GND on Bottom Layer "Top Layer-No Net" (solid, pour order 26): 0,100 0,31.9 100,31.9 100,100